# Altium PCB HGD_Sensor(v0.2)-20200901.PcbDoc
Units mil, origin at the board's own origin, x right, y up, seen from the top; angles counter-clockwise.
Board outline 2299.21 x 2125.98 mil, 2 copper layers (TopLayer, BottomLayer); 55 components, 33 nets, 176 pads, 347 vias.
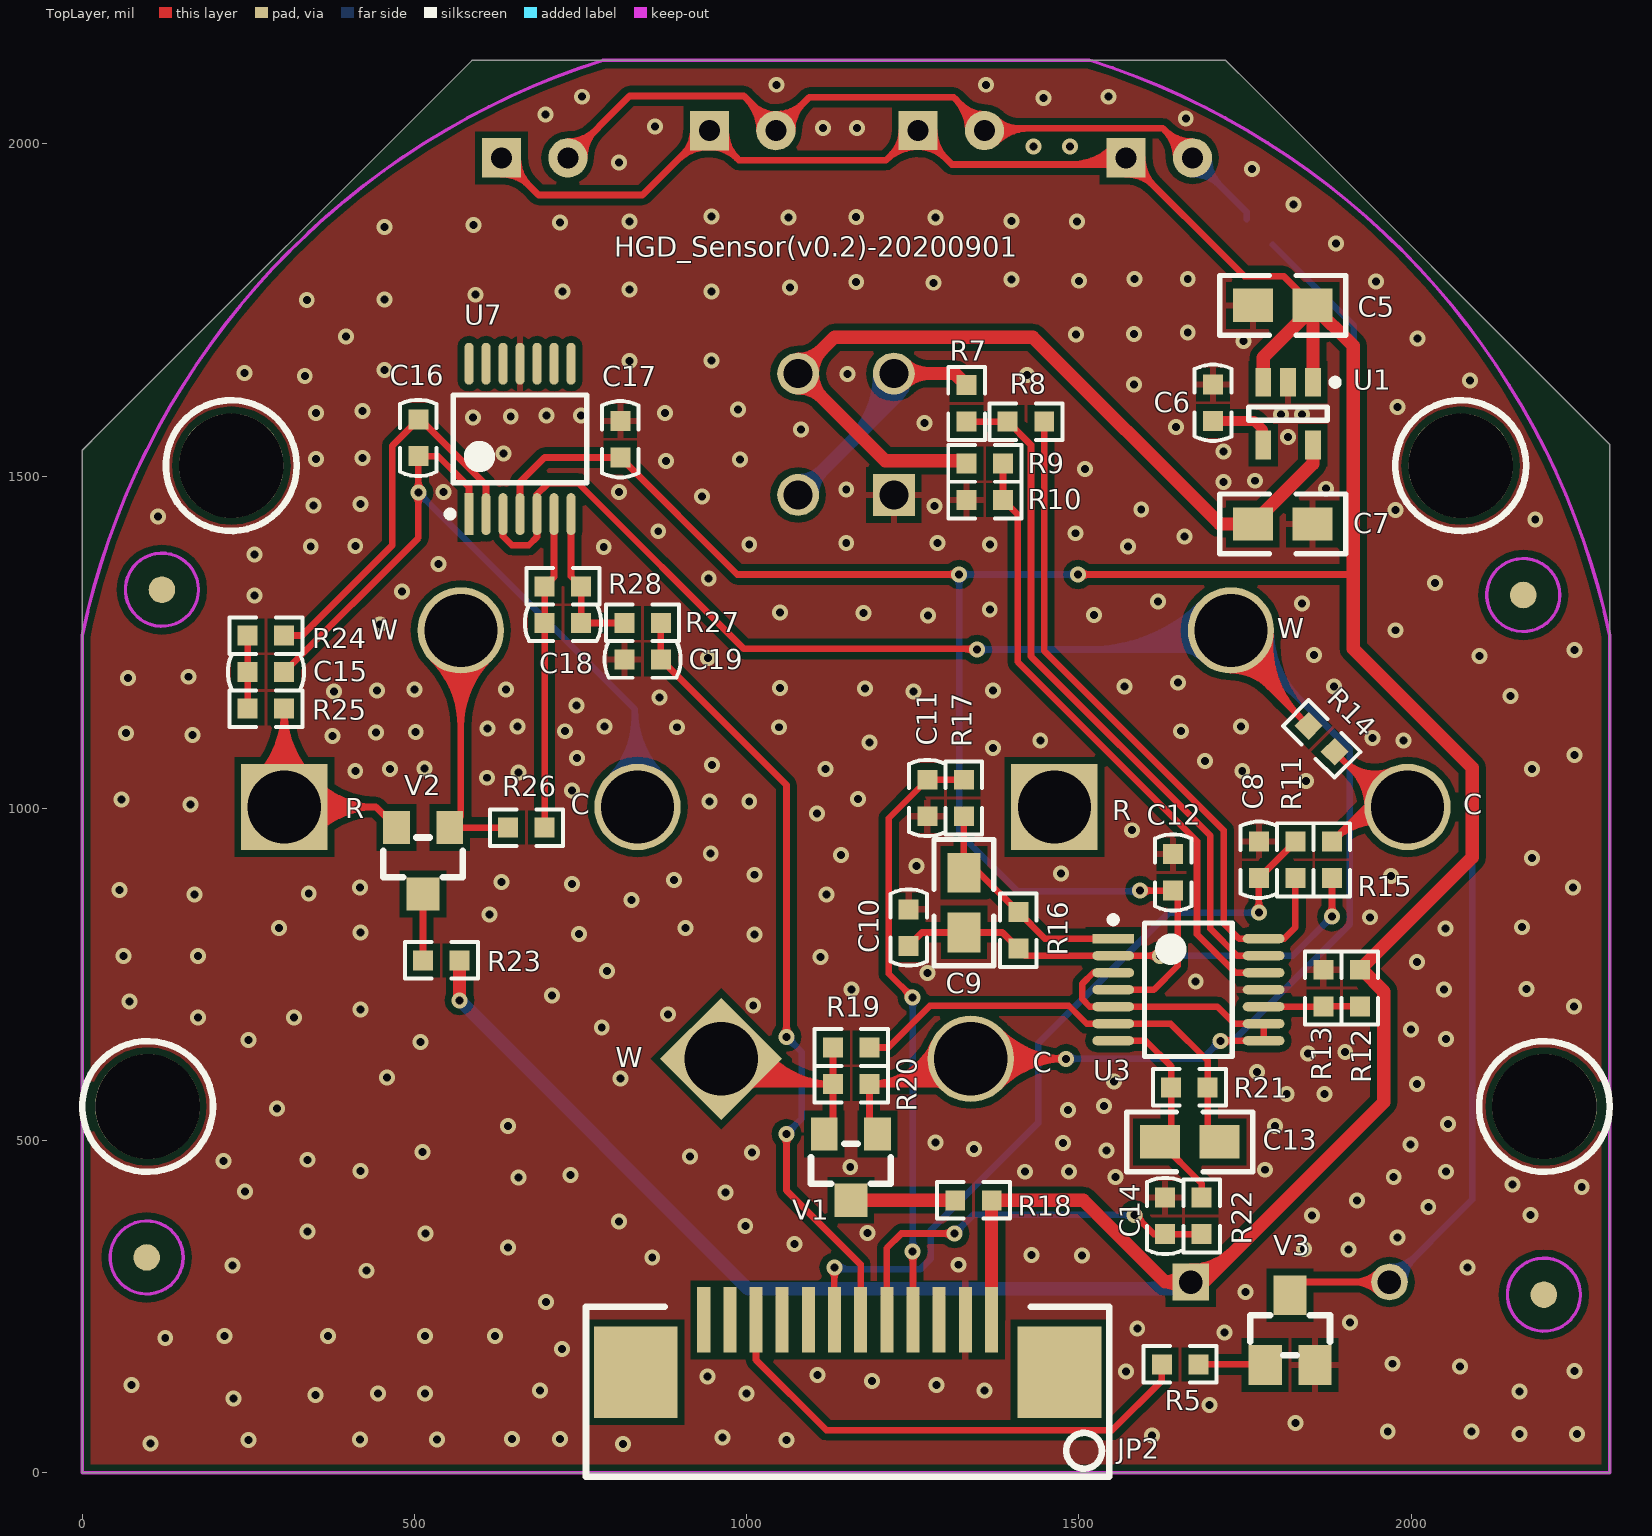
[diagram p0: TopLayer view]
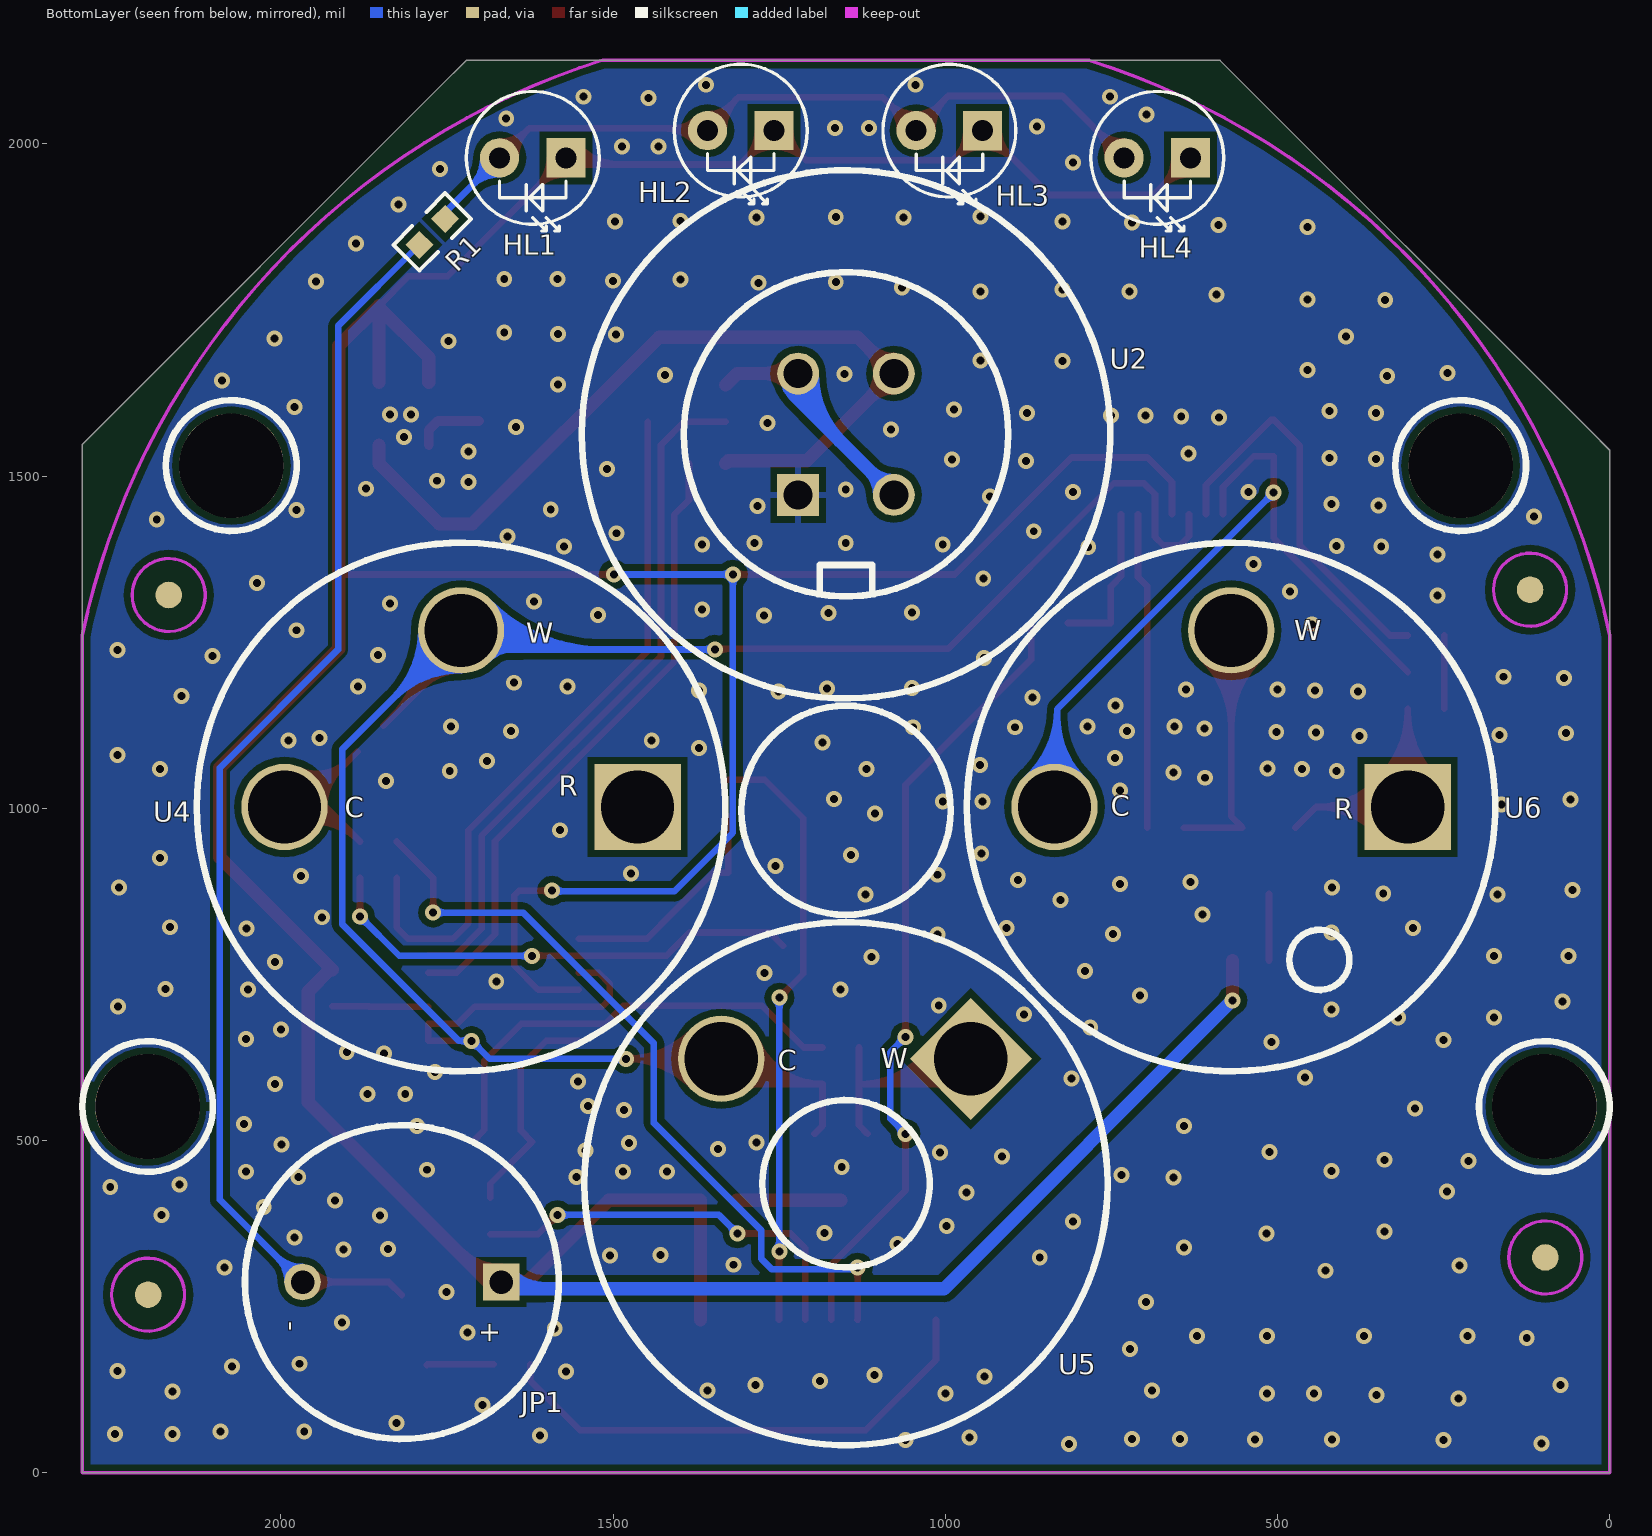
[diagram p1: BottomLayer view, seen from below]

## Layer stack, top to bottom
TopLayer: signal copper 1.4
Dielectric: core 12.6, FR-4, Dk 4.8
BottomLayer: signal copper 1.4

## Board outline
0,0 2299.21,0 2299.21,1547.79 1762,2085 1721.02,2125.98 1515.75,2125.98 783.99,2125.98 783.59,2125.59 586.59,2125.59 30,1569 0,1539 0,1259.84 0,0

## Design rules (kind name [scope] priority, off if disabled: settings)
Clearance Clearance_2 [InNet('RF_IN') vs InNet('GND')] p1: gap=19.68
Clearance [All] p2: gap=10
Clearance Clearance_1 [All] p3: gap=10
ComponentClearance [All] p1 off: gap=10 collisioncheckmode=3 verticalgap=10 showdistances=FALSE
FabricationTestPointUsage TestPointUsage [All] p1: valid=0 allowmultiple=FALSE
FabricationTestpoint Testpoint [(IsPad And (OnTopLayer Or OnBottomLayer))] p1: side=3 testpointundercomponent=TRUE minsize=40 maxsize=100 preferedsize=60 minholesize=20 maxholesize=40 preferedholesize=32 testpointgrid=1 allowsidetop=TRUE allowsidebottom=TRUE usegrid=TRUE gridtolerance=0.01
HoleSize [All] p1: absolutevalues=TRUE maxlimit=200 minlimit=1 maxpercent=80.000 minpercent=20.000
PolygonConnect [IsVia] p1: connectstyle=Direct reliefconductorwidth=10 reliefentries=4 polygonreliefangle="90 Angle"
PolygonConnect PolygonConnect_via [All] p2 off: connectstyle=Relief reliefconductorwidth=10 reliefentries=4 polygonreliefangle="90 Angle"
RoutingVias [All] p1: holewidth=15.75 width=31.5 viastyle="Through Hole" minholewidth=11.81 minwidth=23.62 maxholewidth=19.68 maxwidth=39.37
ShortCircuit [All] p1 off: allowed=FALSE
SilkscreenOverComponentPads [All] p1: minsilkscreentomaskgap=10
SolderMaskExpansion [All] p1: expansion=4
Width [All] p1: maxlimit=100 minlimit=5 preferedwidth=10
22 further rules are at their usual default settings.

## Components (designator, comment, footprint, x,y, rotation, side; value= is the part's Value field where it differs from the comment)
C5 "1uF/25V/5%" 0805 1852,1757 r180 top
C6 "10nF/25V/5%" C0603 1702,1583 r90 top
C7 "1uF/25V/5%" 0805 1762,1428 r0 top
C8 "10nF/25V/5%" C0603 1771,895 r90 top
C9 "1uF/25V/5%" 0805 1327,813 r90 top
C10 "10nF/25V/5%" C0603 1244,793 r90 top
C11 "10nF/25V/5%" C0603 1272,1043 r270 top
C12 "100nF/25V/5%" C0603 1642,931 r270 top
C13 "22uF/25V/5%" 0805 1712,498 r180 top
C14 "10nF/25V/5%" C0603 1630,359 r90 top
C15 "10nF/25V/5%" C0603 304,1205 r180 top
C16 "10nF/25V/5%" C0603 506,1585 r270 top
C17 "100nF/25V/5%" C0603 810,1583 r270 top
C18 "10nF/25V/5%" C0603 751,1279 r180 top
C19 "10nF/25V/5%" C0603 871,1224 r180 top
HL1 "LED红灯" LED-3MM 1571,1979 r0 bottom locked
HL2 "LED红灯" LED-3MM 1258,2020 r0 bottom locked
HL3 "LED红灯" LED-3MM 944,2019.87 r0 bottom locked
HL4 "LED红灯" LED-3MM 631,1979 r0 bottom locked
JP1 "TMB-12A03" TMB-12A03 1818,287 r270 bottom locked
JP2 "FPC-12P" FPC-1.0MM-12P-W 1152,230 r180 top locked
R1 "200R/5%" R0603 1753,1887 r315 bottom
R5 "470R/5%" R0603 1625,163 r0 top
R7 "1K/5%" R0603 1331,1582 r90 top
R8 "4K7/5%" R0603 1448,1582 r180 top
R9 "4K7/5%" R0603 1386,1519 r180 top
R10 "4K7/5%" R0603 1386,1464 r180 top
R11 "10K/5%" R0603 1826,950 r270 top
R12 "4K7/5%" R0603 1923,702 r90 top
R13 "4K7/5%" R0603 1868,702 r90 top
R14 "100R/5%" R0603 1846,1124 r315 top
R15 "470R/5%" R0603 1881,950 r270 top
R16 "10K/5%" R0603 1409,844 r270 top
R17 "10K/5%" R0603 1327,1043 r270 top
R18 "1M/5%" R0603 1314,410 r0 top
R19 "200R/5%" R0603 1185,640 r180 top
R20 "1K/5%" R0603 1130,585 r0 top
R21 "47K/5%" R0603 1694,580 r180 top
R22 "10K/5%" R0603 1685,359 r90 top
R23 "1M/5%" R0603 513,771 r0 top
R24 "10K/5%" R0603 304,1260 r180 top
R25 "10K/5%" R0603 249,1150 r0 top
R26 "100R/5%" R0603 641,971 r0 top
R27 "10K/5%" R0603 816,1279 r0 top
R28 "8K2/5%" R0603 696,1334 r0 top
U1 "SGM2019-3.0YN5G/TR" SGM2019_SOT23-5_95P280X125-5N 1815,1594 r270 top
U2 "MC101" MC101 1149.61,1563 r180 bottom locked
U3 "SGM8634" SGM8634_TSSOP14_65P640X120-14N 1665,727 r0 top
U4 "4O2-GP_V2.0" 4O2-GP_V2.0-1.5K-3.2*2.5*5.8 1729,1002 r180 bottom locked
U5 "ME2-CO" ME2-CO_1.5K-3.2*2.5*5.8 1149.61,435 r225 bottom locked
U6 "4H2S-AS_V2.0" 4H2S-AS_V2.0-1.5K-3.0*2.5*5.8 570,1002 r180 bottom locked
U7 "SGM8634" SGM8634_TSSOP14_65P640X120-14N 659,1556 r90 top locked
V1 "MMBFJ177LT1G" MMBFJ177LT1G_SOT-23 1157,455 r180 top
V2 "MMBFJ177LT1G" MMBFJ177LT1G_SOT-23 513,916 r180 top
V3 "S8050" SOT-23 1818,267 r0 top locked

## Footprints (in the part's own frame and the unit in brackets; to place one, negate y for a bottom-side part, rotate by r counter-clockwise, add the part's x,y. Pads: shape width x height; smd on the part's side, far side on the other; paste and mask are expansions set on the pad)
4H2S-AS_V2.0-1.5K-3.0*2.5*5.8 [mm] "4H2S-AS_V2.0：H2S传感器，4系列插针"
  rect 3.3x3.3 hole 2.8: 1(6.75,0)
  round 3.3 hole 2.8: 2(0,6.75) 3(-6.75,0)
  silkscreen extent -10.1,-10.1 10.1,10.1
4O2-GP_V2.0-1.5K-3.2*2.5*5.8 [mm] "4O2-GP_V2.0：O2传感器，4系列插针"
  rect 3.3x3.3 hole 2.8: 1(6.75,0)
  round 3.3 hole 2.8: 2(0,6.75) 3(-6.75,0)
  silkscreen extent -10.1,-10.1 10.1,10.1
0805 [mil]
  rect 60x50 smd: 1(0,0) 2(90,0)
  silkscreen extent -50,-45 140,45
C0603 [mil]
  rect 30x30 smd: 1(0,0) 2(55,0)
  silkscreen extent -30,-28 85,28
FPC-1.0MM-12P-W [mm] "FPC-1.0MM-12P-W：卧式，抽拉式上接，12P"
  rect 3.2x3.5 smd: 0(-8.1,2) 0(8.1,2)
  rect 0.5x2.5 smd: 1(-5.5,0) 2(-4.5,0) 3(-3.5,0) 4(-2.5,0) 5(-1.5,0) 6(-0.5,0) 7(0.5,0) 8(1.5,0) 9(2.5,0) 10(3.5,0) 11(4.5,0) 12(5.5,0)
  silkscreen extent -10,-0.5 10,6
LED-3MM [mm]
  rect 1.5x1.5 hole 0.8: A(0,0)
  round 1.5 hole 0.8: K(2.54,0)
  silkscreen extent -1.27,-2.54 3.81,2.79
MC101 [mm] "MC101：可燃气体传感器"
  rect 1.6x1.6 hole 1.1: 1(-1.83,-2.32)
  round 1.6 hole 1.1: 2(1.83,-2.32) 3(1.83,2.32) 4(-1.83,2.32)
  silkscreen extent -10.1,-10.1 10.1,10.1
ME2-CO_1.5K-3.2*2.5*5.8 [mm] "ME2-CO：CO传感器，4系列插针"
  rect 3.3x3.3 hole 2.8: 1(0,6.75)
  round 3.3 hole 2.8: 2(-6.75,0)
  silkscreen extent -10,-10 10,10
MMBFJ177LT1G_SOT-23 [mil]
  rect 40x50 smd: 1(-40,-55) 2(40,-55)
  rect 50x50 smd: 3(0,45)
  silkscreen extent -60,-40 60,20
R0603 [mil] "R0603封装电阻"
  rect 30x30 smd: 1(0,0) 2(55,0)
  silkscreen extent -28,-27 82,28
SGM2019_SOT23-5_95P280X125-5N [mm] "SOT23, 5-Leads, Body 3.0x3.0mm (max), Pitch 0.95mm, IPC Medium Density"
  rect 1.1x0.6 smd: 1(-1.2,0.95) 2(-1.2,0) 3(-1.2,-0.95) 4(1.2,-0.95) 5(1.2,0.95)
  silkscreen extent -1.32,-1.5 0.25,1.93, body extent -0.85,-1.51 0.85,1.51, height 1.25
SGM8634_TSSOP14_65P640X120-14N [mm] "TSOP, 14-Leads, Body 5.1x4.5mm (max), Pitch 0.65mm, IPC Medium Density"
  rect 1.6x0.35 smd: 1(-2.875,1.95)
  oval 1.6x0.35 smd: 2(-2.875,1.3) 3(-2.875,0.65) 4(-2.875,0) 5(-2.875,-0.65) 6(-2.875,-1.3) 7(-2.875,-1.95) 8(2.875,-1.95) 9(2.875,-1.3) 10(2.875,-0.65) 11(2.875,0) 12(2.875,0.65) 13(2.875,1.3) 14(2.875,1.95)
  silkscreen extent -3,-2.55 1.68,2.8, body extent -2.25,-2.55 2.25,2.55, height 1.2
SOT-23 [mil]
  rect 50x60 smd: B(-37.5,-105) C(0,0) E(37.5,-105)
  silkscreen extent -60,-90 60,-30
TMB-12A03 [mm] "TMB-12A03：3.3V有源蜂鸣器"
  rect 1.4x1.4 hole 0.9: 1(0,3.8)
  round 1.4 hole 0.9: 2(0,-3.8)
  silkscreen extent -6,-6 6,6

## Part data
C5 C6 C7 C8 C9 C10 C11 C12 C13 C14 C15 C16 C17 C18 C19: library part CAP, "电容"
HL1 HL2 HL3 HL4: library part 发光二极管, "发光二极管"
JP1: "TMB-12A03：3.3V有源蜂鸣器"
R1 R5 R7 R8 R9 R10 R11 R12 R13 R14 R15 R16 R17 R18 R19 R20 R21 R22 R23 R24 R25 R26 R27 R28: library part RES2, "电阻"
U1: library part SGM2019, "SGM2019：Low Power, Low Dropout, RF Linear Regulators"
U2: "MC101：可燃气体传感器"
U3 U7: "SGM8634：470μA, 6MHz, Rail-to-Rail I/O, CMOS Operational Amplifier"
U4: "4O2-GP_V2.0：O2传感器"
U5: "ME2-CO：CO传感器"
U6: "4H2S-AS_V2.0：H2S传感器"
V1 V2: "MMBFJ177LT1G：P-JFET?Chopper"
V3: library part NPN, "NPN三极管"

## Free pads (board coordinates)
  round 40 smd far side: 0(97,324) 0(120,1329) 0(2169,1321) 0(2200,268)
  round 157.48 hole 157.48: 0(98.43,551.18) 0(224.41,1515.75) 0(2074.8,1515.75) 0(2200.79,551.18)
  round 40 smd: 1(97,324) 1(120,1329) 1(2169,1321) 1(2200,268)
  round 100 on Bottom Solder: 2(97,324) 2(120,1329) 2(2169,1321) 2(2200,268)
  round 100 on Top Solder: 3(97,324) 3(120,1329) 3(2169,1321) 3(2200,268)

## Via types
v1: diameter 24, hole 12, TopLayer to BottomLayer, tented both sides, 347 vias

## Nets (pads, with @x,y where several pads share a name; then routed paths per layer and width w, separated by ;. In a path a pad name is that pad's centre, name@x,y a point inside that pad or via, vN(x,y) a via of type N, cw(c..) or ccw(c..) an arc to the next point about the centre after c; other vN are vias at no path point)
3V: C7.1 R9.2 U1.5 U2.3 | length 1615.2
  TopLayer w20: R9.2 1326.84,1523.16 1208.74,1523.16 U2.3 1132.22,1709 1431,1709 1712,1428 C7.1 1852.4,1518.4 U1.5 ; U2.3@1099.06,1654.34 ccw(c1150.95,1654.34) 1114.26,1617.64 ; U2.3@1099.06,1654.34 cw(c1150.95,1654.34) 1114.26,1691.03 ; U2.3@1099.06,1654.34 ccw(c1150.95,1654.34) 1114.26,1617.64 ; U2.3@1099.06,1654.34 cw(c1150.95,1654.34) 1114.26,1691.03 ; 1114.26,1617.64 ccw(c1077.56,1580.95) 1077.56,1632.84 cw(c1077.56,1580.95) 1114.26,1617.64 ; 1114.26,1691.03 cw(c1077.56,1727.73) 1077.56,1675.83 ccw(c1077.56,1727.73) 1114.26,1691.03
3V3: C5.1 C12.2 C17.2 HL1.A HL2.A HL3.A HL4.A JP1.1 JP2.1 R12.2 R18.2 R23.2 U1.1 U1.3 U3.4 U7.4 | length 9391.6
  TopLayer w10: HL4.A@631,1954.47 cw(c631,1895.26) 672.87,1937.13 cw(c714.74,1979) HL4.A@655.53,1979 ; HL4.A@631,1964.47 cw(c631,1929.4) 655.8,1954.2 cw(c680.6,1979) HL4.A@645.53,1979 ; HL4.A 687,1923 843.13,1923 944,2023.87 HL3.A@946,2021.87 ; U7.4 659,1491 696,1528 C17.2 986,1352 v1(1320,1352) ; 895.3,1975.17 cw(c944,1926.47) 944,1995.35 cw(c944,1936.13) 985.87,1978 cw(c1027.74,2019.87) HL3.A@968.53,2019.87 ; 904.96,1984.83 ccw(c869.91,2019.87) HL3.A@919.47,2019.87 ; 912.37,1992.25 cw(c944,1960.62) 944,2005.35 cw(c944,1970.27) 968.8,1995.07 cw(c993.6,2019.87) HL3.A@958.53,2019.87 ; HL3.A 988.53,1975.35 1209.47,1975.35 1258,2023.87 HL2.A@1259.94,2021.94 ; 1209.52,1975.39 cw(c1258,1926.91) 1258,1995.47 cw(c1258,1936.26) 1299.87,1978.13 cw(c1341.74,2020) HL2.A@1282.53,2020 ; 1218.87,1984.74 ccw(c1183.61,2020) HL2.A@1233.47,2020 ; 1226.59,1992.46 cw(c1258,1961.05) 1258,2005.47 cw(c1258,1970.4) 1282.8,1995.2 cw(c1307.6,2020) HL2.A@1272.53,2020 ; HL2.A 1309,1969 1561,1969 HL1.A 1749,1801 1808,1801 C5.1 C5.1@1852.4,1756.6 ; v1@1315.05,1347.05 ccw(c1303.1,1335.1) 1303.1,1352 ccw(c1303.1,1368.9) v1@1315.05,1356.95 ; 1487.64,1969 ccw(c1487.64,2062.36) HL1.A@1553.66,1996.34 ; v1(1499,1352) 1913,1352 ; v1@1503.95,1347.05 cw(c1515.9,1335.1) 1515.9,1352 cw(c1515.9,1368.9) v1@1503.95,1356.95 ; 1511.79,1969 ccw(c1511.79,2038.21) HL1.A@1560.73,1989.27 ; U3.4 1613,727 1649,763 1649,869 C12.2 v1(1592,876) ; HL1.A@1553.66,1961.66 ccw(c1535.93,1943.93) 1535.93,1969 ccw(c1535.93,2014.07) HL1.A@1567.8,1982.2 ; HL1.A@1571,1954.47 cw(c1571,1895.26) 1612.87,1937.13 cw(c1654.74,1979) HL1.A@1595.53,1979 ; HL1.A@1571,1964.47 cw(c1571,1929.4) 1595.8,1954.2 cw(c1620.6,1979) HL1.A@1585.53,1979 ; v1@1596.95,871.05 cw(c1608.9,859.1) 1608.9,876 cw(c1608.9,892.9) v1@1596.95,880.95
  TopLayer w20: v1(568,711) R23.2 ; JP2.1 1368.54,409.54 R18.2 1507,410 1630,287 ; U1.3 1777.6,1678.6 C5.1@1852,1753 ; U1.1 1852.4,1756.6 1913,1696 1913,1352 1913,1240 2092,1061 2092,926 R12.2 ; R12.2@1926.28,757 1959,724.28 1959,557.61 1688.39,287 JP1.1 1630,287 ; 1630,287 cw(c1630,253.81) 1655.11,275.52 ccw(c1630,253.81) 1630,287 ; 1630,287 ccw(c1630,320.19) 1655.11,298.48 cw(c1630,320.19) 1630,287 ; JP1.1@1668.39,284.56 ccw(c1668.39,326.95) 1698.37,296.98 cw(c1668.39,326.95) JP1.1@1668.39,284.56 ; JP1.1@1668.39,304.56 ccw(c1668.39,395.23) 1732.51,331.12 cw(c1668.39,395.23) JP1.1@1668.39,304.56
  BottomLayer w10: v1@1315.05,1347.05 cw(c1303.1,1335.1) 1320,1335.1 cw(c1336.9,1335.1) 1324.95,1347.05 cw(c1336.9,1335.1) 1336.9,1352 cw(c1336.9,1368.9) v1@1324.95,1356.95 ; v1@1494.05,1347.05 ccw(c1482.1,1335.1) 1482.1,1352 ccw(c1482.1,1368.9) v1@1494.05,1356.95 ; v1(1499,1352) v1(1320,1352) 1320,963 1408,875 1591,875 v1(1592,876) ; 1572.69,875 ccw(c1572.69,895.31) v1@1587.05,880.95 ; 1577.51,875 cw(c1577.51,861.51) v1@1587.05,871.05
  BottomLayer w20: v1(568,711) 1002,277 1658.39,277 JP1.1 ; 1601.86,277 ccw(c1601.86,353.53) 1655.98,299.42 cw(c1601.86,353.53) 1601.86,277
ADC_CO: C14.1 JP2.5 R22.1 | length 720.9
  TopLayer w10: JP2.5 1211.06,338.06 1233,360 v1(1313,360) ; v1@1308.05,355.05 ccw(c1296.1,343.1) 1296.1,360 ccw(c1296.1,376.9) v1@1308.05,364.95 ; v1@1584,381 cw(c1584,364.1) 1595.95,376.05 cw(c1607.9,388) v1@1591,388 ; v1(1584,388) 1613,359 C14.1 R22.1
  BottomLayer w10: v1(1313,360) 1341,388 v1(1584,388) ; v1@1313,367 ccw(c1313,383.9) 1324.95,371.95 ccw(c1336.9,360) v1@1320,360 ; v1@1579.05,383.05 ccw(c1567.1,371.1) 1567.1,388 ccw(c1567.1,404.9) v1@1579.05,392.95
ADC_H2S: C19.1 JP2.6 R27.2 | length 1361.1
  TopLayer w10: R27.2 C19.1 1060,1035 v1(1060,656) ; v1@1055.05,505.05 cw(c1043.1,493.1) 1060,493.1 cw(c1076.9,493.1) v1@1064.95,505.05 ; v1@1055.05,660.95 ccw(c1043.1,672.9) 1060,672.9 ccw(c1076.9,672.9) v1@1064.95,660.95 ; v1(1060,510) 1060,425 1171.68,313.32 JP2.6 1171.68,292.32
  BottomLayer w10: v1(1060,510) 1083,533 1083,633 v1(1060,656) ; v1@1060,517 ccw(c1060,533.9) 1071.95,521.95 ccw(c1083.9,510) v1@1067,510 ; v1@1060,649 cw(c1060,632.1) 1071.95,644.05 cw(c1083.9,656) v1@1067,656
ADC_LEL: C8.1 JP2.7 R11.1 | length 1315.5
  TopLayer w10: v1(1132,309) 1132,230.32 JP2.7 ; v1@1766.05,847.95 ccw(c1754.1,859.9) 1771,859.9 ccw(c1787.9,859.9) v1@1775.95,847.95 ; v1(1771,843) C8.1 R11.1 ; 1132,292.1 cw(c1148.9,292.1) 1136.95,304.05 ccw(c1148.9,292.1) 1132,292.1 ; 1132,292.1 ccw(c1115.1,292.1) 1127.05,304.05 cw(c1115.1,292.1) 1132,292.1
  BottomLayer w10: v1(1132,309) 1135,306 1261.18,306 1277,321.82 1277,364.47 1438.73,526.2 1438.73,645.92 1635.81,843 v1(1771,843) ; v1@1766.05,838.05 ccw(c1754.1,826.1) 1754.1,843 ccw(c1754.1,859.9) v1@1766.05,847.95 ; v1@1136.95,313.95 ccw(c1156.14,333.14) 1156.14,306 cw(c1156.14,333.14) v1@1136.95,313.95
ADC_O2: C11.1 JP2.4 R17.1 | length 1013.3
  TopLayer w10: v1@1243,715 ccw(c1226.1,715) 1238.05,726.95 ccw(c1250,738.9) v1@1250,722 ; v1@1245.05,328.05 cw(c1232.07,315.07) 1250.43,315.07 ; v1(1250,333) 1250.43,332.57 JP2.4 ; v1(1250,715) 1214,751 1214,985 C11.1 R17.1 ; 1250.43,317.13 cw(c1265.87,317.13) v1@1254.95,328.05
  BottomLayer w10: v1@1245.05,337.95 ccw(c1233.1,349.9) 1250,349.9 ccw(c1266.9,349.9) v1@1254.95,337.95 ; v1@1245.05,710.05 cw(c1233.1,698.1) 1250,698.1 cw(c1266.9,698.1) v1@1254.95,710.05 ; v1(1250,333) v1(1250,715)
AGND: R14.1 R20.2 U3.3 U3.5 U3.8 U3.9 U4.2 U5.2 U7.3 U7.5 V1.1 | length 7241.2
  TopLayer w10: U7.3 633.41,1409.59 647,1396 672,1396 684.59,1408.59 U7.5 684.59,1472.78 699.4,1487.59 ; 701.11,1489.31 746.69,1489.31 996,1240 v1@1346,1240 ; V1.1 1185,522 R20.2 ; 1200.59,585 ccw(c1200.59,685.66) U5.2@1292.1,643.73 ; 1216.17,585 ccw(c1216.17,678.52) U5.2@1301.19,639.56 ; 1231.75,585 ccw(c1231.75,671.38) U5.2@1310.28,635.39 ; 1247.34,585 ccw(c1247.34,664.24) U5.2@1319.37,631.23 ; 1262.92,585 ccw(c1262.92,657.1) U5.2@1328.46,627.06 ; 1278.5,585 ccw(c1278.5,649.96) U5.2@1337.55,622.9 ; U5.2@1283.01,647.89 cw(c1185,692.81) R20.2 ; 1284.29,585 cw(c1284.29,569.68) U5.2@1295.12,580.51 ; 1327.69,1240 cw(c1327.69,1219.69) v1@1342.05,1234.05 ; 1332.51,1240 ccw(c1332.51,1253.49) v1@1342.05,1243.95 ; U5.2@1358.85,601.87 cw(c1409.16,552.23) 1409.16,622.91 cw(c1409.16,693.6) U5.2@1358.85,643.95 ; U5.2@1365.97,594.85 cw(c1433.08,528.64) 1433.08,622.91 cw(c1433.08,717.19) U5.2@1365.97,650.98 ; U5.2@1373.08,587.82 cw(c1456.99,505.04) 1456.99,622.91 cw(c1456.99,740.78) U5.2@1373.08,658 ; U5.2@1380.2,580.8 cw(c1480.9,481.45) v1@1480.9,622.91 ; U5.2@1380.2,665.02 ccw(c1480.9,764.37) v1@1480.9,622.91 ; 1463.89,622.91 ccw(c1463.89,640.11) v1@1476.05,627.95 ; 1464.31,622.91 cw(c1464.31,606.31) v1@1476.05,618.05 ; v1(1481,623) v1@1480.91,622.91 ; U3.3 1521.84,752.59 1505.32,736.07 1505.32,712.68 1516.59,701.41 U3.5 1708.59,701.41 1734.18,675.82 U3.9 U3.8 v1@1713.23,650.23 ; v1@1717.95,645.05 cw(c1730.45,632.55) 1730.45,650.23 ; v1@1717.95,654.95 ccw(c1729.35,666.35) 1729.35,650.23 ; U4.2@1729,1207.79 cw(c1729,1127.61) 1785.7,1184.3 ; U4.2@1729,1217.79 cw(c1729,1161.75) 1768.63,1201.37 ; U4.2 1729,1241 R14.1 ; U4.2@1748.85,1265.67 ccw(c1833.4,1256.82) 1773.29,1196.71 ; U4.2@1758.8,1264.63 ccw(c1860.25,1254.01) 1788.12,1181.88 ; U4.2@1768.74,1263.59 ccw(c1887.11,1251.2) 1802.96,1167.04 ; U4.2@1778.69,1262.55 ccw(c1913.97,1248.39) 1817.79,1152.21 ; U4.2@1788.63,1261.51 ccw(c1940.82,1245.58) 1832.62,1137.38 ; R20.2 1299.61,585 U5.2 v1@1480.91,622.91
  BottomLayer w10: v1(1347,1239) 1700.25,1239 U4.2 1908,1088.75 1908,825.82 1732.18,650 v1(1713,650) 1686,623 v1(1481,623) ; v1@1351.95,1234.05 cw(c1363.9,1222.1) 1363.9,1239 cw(c1363.9,1255.9) v1@1351.95,1243.95 ; v1@1485.95,618.05 cw(c1497.9,606.1) 1497.9,623 cw(c1497.9,639.9) v1@1485.95,627.95 ; 1514.84,1239 ccw(c1514.84,1481.91) U4.2@1686.6,1310.15 ; 1538.98,1239 ccw(c1538.98,1457.77) U4.2@1693.67,1303.08 ; 1563.12,1239 ccw(c1563.12,1433.63) U4.2@1700.74,1296 ; 1587.26,1239 ccw(c1587.26,1409.48) U4.2@1707.81,1288.93 ; 1611.41,1239 ccw(c1611.41,1385.34) U4.2@1714.89,1281.86 ; 1635.55,1239 ccw(c1635.55,1361.2) U4.2@1721.96,1274.79 ; 1653.65,1239 cw(c1653.65,1192.39) U4.2@1686.6,1225.35 ; 1659.69,1239 ccw(c1659.69,1337.06) U4.2 ; v1@1706,650 cw(c1689.1,650) 1701.05,638.05 cw(c1713,626.1) v1@1713,643 ; v1@1717.95,645.05 cw(c1729.9,633.1) 1729.9,650 cw(c1729.9,666.9) v1@1717.95,654.95 ; U4.2@1729,1207.79 cw(c1729,1063.03) 1831.36,1165.39 cw(c1933.72,1267.75) U4.2@1788.96,1267.75 ; U4.2@1729,1217.79 cw(c1729,1097.17) 1814.29,1182.46 cw(c1899.58,1267.75) U4.2@1778.96,1267.75 ; U4.2@1729,1227.79 cw(c1729,1131.31) 1797.22,1199.53 cw(c1865.43,1267.75) U4.2@1768.96,1267.75 ; U4.2@1729,1237.79 cw(c1729,1165.46) 1780.15,1216.6 cw(c1831.29,1267.75) U4.2@1758.96,1267.75
BEEP: JP2.10 R5.1 | length 769.9
  TopLayer w10: JP2.10 1014.2,169.8 1120,64 1550,64 1625,139 R5.1
DGND: C5.2 C6.2 C7.2 C8.2 C10.2 C11.2 C12.1 C14.2 C17.1 C19.2 JP2.2 R10.2 R13.2 U1.2 U2.1 U3.11 U7.11 V3.E
  other v1: 814,43 103,44 250,49 1060,49 418,50 534,50 647,51 719,51 964,53 1610,56 2163,58 2250,58 1965,62 2091,62 1826,75 1697,102 228,112 351,117 445,119 516,119 1000,119 2163,122 689,124 1358,124 74,132 1286,132 1189,138 941,145 1107,147 1571,152 2246,153 2074,160 1972,164 722,186 125,203 214,206 370,206 516,206 621,206 1719,211 1588,217 1908,226 698,257 1751,272 428,304 2085,309 226,312 1319,313 858,324 1505,327 1429,328 1906,336 1839,337 641,339 1072,344 1980,354 517,360 1182,361 339,363 998,371 808,378 1851,387 2180,388 2026,400 1919,410 968,422 245,423 2257,430 2153,434 657,444 1555,445 1974,445 735,448 1419,453 1485,453 2053,453 419,454 1780,456 1156,460 213,469 339,471 915,476 1008,482 512,483 1542,485 1342,487 1999,494 1476,496 1284,497 641,522 1795,522 2056,525 1484,546 293,548 1538,552 1813,570 1870,570 2009,585 1553,589 810,593 459,595 1768,603 1845,631 1901,633 509,648 250,651 2053,653 2000,667 782,670 174,685 319,685 882,690 419,697 2245,702 1010,703 71,709 707,718 1158,727 2050,727 2174,728 1676,739 1272,752 790,755 2009,769 1111,776 62,778 174,778 1012,810 748,811 419,813 2052,819 296,820 908,820 2167,821 1938,836 613,840 827,862 169,870 1120,870 341,872 56,877 418,881 2244,881 737,886 631,889 891,892 1970,898 1012,900 1473,902 1256,913 2182,925 1142,930 946,932 1580,967 1106,992 163,1006 944,1010 1004,1010 59,1013 1168,1014 737,1027 1842,1041 609,1046 657,1054 411,1056 1746,1056 463,1059 1119,1059 2182,1059 515,1060 948,1065 1690,1071 745,1076 2246,1080 1371,1091 1185,1099 1442,1102 1989,1102 1942,1106 377,1109 166,1110 66,1113 442,1114 502,1115 727,1116 1654,1116 610,1120 895,1122 1049,1122 655,1123 786,1123 1744,1123 744,1155 869,1167 2150,1169 379,1176 1251,1176 444,1177 1371,1177 500,1179 638,1179 1178,1180 1050,1181 1569,1183 1884,1183 1649,1189 69,1196 160,1198 942,1226 2103,1229 1854,1231 2246,1238 1977,1268 448,1277 1273,1290 1523,1291 1176,1294 1050,1295 1366,1299 1836,1308 1619,1311 259,1320 481,1326 2036,1339 943,1346 536,1368 259,1382 785,1393 344,1394 1574,1394 411,1395 1004,1397 1366,1397 1150,1399 1287,1399 1659,1409 1495,1414 867,1417 2187,1435 114,1439 1977,1449 1594,1450 1283,1455 348,1456 419,1458 933,1469 544,1476 808,1476 1150,1480 1872,1481 1718,1491 1765,1493 1509,1511 879,1523 990,1525 352,1526 422,1527 634,1534 1718,1537 1815,1559 1082,1570 1646,1574 1268,1580 588,1588 645,1590 699,1591 751,1591 1804,1593 1836,1593 352,1595 877,1595 422,1598 987,1600 1980,1604 1583,1638 2089,1644 335,1651 1422,1652 1152,1654 244,1655 455,1660 824,1673 947,1674 1748,1703 2010,1707 397,1710 1496,1713 1583,1714 1664,1716 338,1765 455,1766 592,1773 723,1778 947,1778 824,1781 1065,1784 1281,1791 1165,1792 1947,1793 1500,1794 1399,1796 1584,1797 1664,1797 1887,1850 455,1875 589,1878 719,1882 824,1883 1497,1883 1399,1884 1063,1889 1284,1889 1165,1890 947,1891 1823,1909 1761,1962 808,1972 1432,1996 1487,1996 1115,2024 1166,2024 862,2026 1661,2038 697,2044 1447,2069 752,2071 1545,2071 1045,2089 1360,2089
H2S_C: C15.1 C16.2 U6.3 U7.1 | length 1917.5
  TopLayer w10: C15.1 506,1407 v1(506,1475) ; v1@501.05,1479.95 ccw(c489.1,1491.9) 506,1491.9 ccw(c522.9,1491.9) v1@510.95,1479.95 ; 506,1457.82 v1(506,1475) ; U7.1 582.23,1483.77 536,1530 C16.2 v1(506,1475) ; 506,1458.1 cw(c522.9,1458.1) 510.95,1470.05 ccw(c522.9,1458.1) 506,1458.1 ; 506,1458.1 ccw(c489.1,1458.1) 501.05,1470.05 cw(c489.1,1458.1) 506,1458.1
  BottomLayer w10: v1@506,1468 cw(c506,1451.1) 517.95,1463.05 cw(c529.9,1475) v1@513,1475 ; v1(506,1475) 831.75,1149.25 ; U6.3@793.35,1044.4 ccw(c700.65,1137.1) 831.75,1137.1 ; U6.3@800.42,1037.33 ccw(c724.79,1112.96) 831.75,1112.96 ; U6.3@807.49,1030.26 ccw(c748.93,1088.82) 831.75,1088.82 ; U6.3@831.75,971 831.75,1149.25 ; 831.75,1080.18 ccw(c908.76,1080.18) U6.3@856.2,1023.9 ; 831.75,1103.2 ccw(c930.26,1103.2) U6.3@863.02,1031.21 ; 831.75,1126.22 ccw(c951.75,1126.22) U6.3@869.85,1038.51 ; U6.3@876.67,1045.82 cw(c973.25,1149.24) 831.75,1149.24
H2S_R: R25.2 U6.1 V2.2 | length 1643.3
  TopLayer w10: U6.1@261.85,1044.4 ccw(c160.1,1146.15) R25.2@304,1146.15 ; U6.1@268.92,1037.33 ccw(c184.24,1122.01) 304,1122.01 ; U6.1@276,1030.26 ccw(c208.39,1097.86) 304,1097.86 ; U6.1@283.07,1023.19 ccw(c232.53,1073.72) 304,1073.72 ; 304,1074.94 ccw(c377.19,1074.94) U6.1@325.44,1023.19 ; 304,1099.08 ccw(c401.33,1099.08) U6.1@332.51,1030.26 ; 304,1123.22 ccw(c425.48,1123.22) U6.1@339.58,1037.33 ; R25.2@304,1147.37 ccw(c449.62,1147.37) U6.1@346.65,1044.4 ; R25.2 304,1002.25 U6.1 442,1002 ; U6.1@326.18,981.59 cw(c373.08,937.93) 373.08,1002 cw(c373.08,1066.07) U6.1@326.18,1022.41 ; U6.1@333.5,974.77 cw(c396.05,916.54) 396.05,1002 cw(c396.05,1087.46) U6.1@333.5,1029.23 ; U6.1@340.82,967.96 cw(c419.02,895.15) 419.02,1002 cw(c419.02,1108.85) U6.1@340.82,1036.04 ; U6.1@348.14,961.14 cw(c441.99,873.77) 441.99,1002 ; U6.1@348.14,1042.86 ccw(c441.99,1130.23) 441.99,1002 ; V2.2 442,1002
H2S_W: R26.1 U6.2 V2.1 | length 1073.8
  TopLayer w10: U6.2@527.6,1225.35 cw(c425.24,1122.99) 570,1122.99 cw(c714.76,1122.99) U6.2@612.4,1225.35 ; U6.2@534.67,1232.42 cw(c449.38,1147.13) 570,1147.13 cw(c690.62,1147.13) U6.2@605.33,1232.42 ; U6.2@541.74,1239.49 cw(c473.53,1171.27) 570,1171.27 cw(c666.47,1171.27) U6.2@598.26,1239.49 ; U6.2@548.81,1246.56 cw(c497.67,1195.42) 570,1195.42 cw(c642.33,1195.42) U6.2@591.19,1246.56 ; U6.2 570,988 V2.1 R26.1
LED: JP1.2 R1.2 V3.C | length 2160.9
  TopLayer w10: V3.C 1838,287 JP1.2 ; JP1.2@1951.65,271.05 ccw(c1913.14,232.54) 1913.14,287 ccw(c1913.14,341.46) JP1.2@1951.65,302.95 ; JP1.2@1958.73,278.12 ccw(c1937.29,256.68) 1937.29,287 ccw(c1937.29,317.32) JP1.2@1958.73,295.88
  BottomLayer w10: R1.2 1914,1726 1914,1239 2092,1061 2092,410.82 JP1.2@1968.18,287 ; JP1.2@1967.61,299.56 ccw(c1967.61,331.27) 1990.03,308.85 ; JP1.2@1967.61,309.56 ccw(c1967.61,365.42) 2007.1,325.92 ; JP1.2@1980.17,287 cw(c2009.09,287) 1988.64,307.45 ; JP1.2@1990.17,287 cw(c2043.23,287) 2005.71,324.52
NetC6_1: C6.1 U1.4 | length 103.9
  TopLayer w15: C6.1 1764,1583 1777.6,1569.4 U1.4
NetC9_1: C9.1 C10.1 R15.2 R16.2 U3.2 | length 883.4
  TopLayer w10: C10.1 1264,813 C9.1 1385,813 R16.2 1419.82,778.18 U3.2 ; 1586.82,778.18 U3.2 ; 1604.66,778.18 cw(c1604.66,760.66) v1@1617.05,773.05 ; 1605.54,778.18 ccw(c1605.54,794.46) v1@1617.05,782.95 ; v1(1622,778) 1621.82,778.18 U3.2 ; v1@1876.05,841.95 ccw(c1864.1,853.9) 1881,853.9 ccw(c1897.9,853.9) v1@1885.95,841.95 ; v1(1881,837) R15.2
  BottomLayer w10: v1(1622,778) 1822,778 v1(1881,837) ; v1@1626.95,773.05 cw(c1638.9,761.1) 1638.9,778 cw(c1638.9,794.9) v1@1626.95,782.95 ; v1@1874,837 cw(c1857.1,837) 1869.05,825.05 cw(c1881,813.1) v1@1881,830
NetC9_2: C9.2 R16.1 R17.2 U3.1 | length 350.9
  TopLayer w10: R17.2 C9.2 1350,903 R16.1 1449.23,803.77 U3.1
NetC13_1: C13.1 R19.1 R21.1 U3.6 | length 698.8
  TopLayer w10: R19.1 1213.18,640 1276.06,702.87 1484.95,702.87 1512,675.82 U3.6 1638.18,675.82 1694,620 R21.1 1694,516 C13.1
NetC13_2: C13.2 R21.2 R22.2 U3.7 | length 334.2
  TopLayer w10: U3.7 1600.77,650.23 1639,612 R21.2 1639,515 C13.2 1685,435 R22.2
NetC15_2: C15.2 R24.2 R25.1 | length 110
  TopLayer w10: R25.1 C15.2 R24.2
NetC16_1: C16.1 R24.1 U7.2 | length 607.3
  TopLayer w10: R24.1 330.72,1260 466.86,1396.14 466.86,1545.86 C16.1 ; C16.1@509.28,1585 607.82,1486.47 U7.2
NetC18_1: C18.1 R27.1 R28.2 U7.7 | length 235.1
  TopLayer w10: U7.7 735.77,1349.23 R28.2 C18.1 R27.1
NetC18_2: C18.2 R26.2 R28.1 U7.6 | length 477.7
  TopLayer w10: R26.2 C18.2 R28.1 710.18,1348.18 U7.6
NetHL1_K: HL1.K HL2.K HL3.K HL4.K R1.1 | length 2162.7
  TopLayer w10: HL4.K 824,2072 995.87,2072 HL3.K@1044,2023.87 ; HL4.K@731,1993.53 ccw(c731,2028.6) 755.8,2003.8 ccw(c780.6,1979) HL4.K@745.53,1979 ; HL4.K@731,2003.53 ccw(c731,2062.74) 772.87,2020.87 ccw(c814.74,1979) HL4.K@755.53,1979 ; 999.3,2068.57 cw(c950.6,2019.87) HL3.K@1019.47,2019.87 ; 1008.96,2058.92 ccw(c1044,2093.96) 1044,2044.4 ccw(c1044,2103.62) 1085.87,2061.75 ccw(c1127.74,2019.87) HL3.K@1068.53,2019.87 ; 1016.37,2051.5 cw(c984.74,2019.87) HL3.K@1029.47,2019.87 ; HL3.K 1094.13,2070 1311.87,2070 HL2.K@1358,2023.87 ; HL3.K@1044,2034.4 ccw(c1044,2069.47) 1068.8,2044.67 ccw(c1093.6,2019.87) HL3.K@1058.53,2019.87 ; 1313.39,2068.48 cw(c1264.91,2020) HL2.K@1333.47,2020 ; 1322.74,2059.13 ccw(c1358,2094.39) HL2.K@1358,2044.53 ; 1330.46,2051.41 cw(c1299.05,2020) HL2.K@1343.47,2020 ; HL2.K 1361.53,2023.53 1626.47,2023.53 HL1.K ; HL2.K@1368.27,2009.73 cw(c1401.59,1976.41) 1401.59,2023.53 ; HL2.K@1375.34,2002.66 cw(c1425.73,1952.27) 1425.73,2023.53 ; HL2.K@1375.34,2037.34 ccw(c1408.7,2070.7) 1408.7,2023.53 ; HL1.K@1646.47,1979 ccw(c1587.26,1979) 1629.13,2020.87 ccw(c1671,2062.74) HL1.K@1671,2003.53 ; HL1.K@1656.47,1979 ccw(c1621.4,1979) 1646.2,2003.8 ccw(c1671,2028.6) HL1.K@1671,1993.53
  BottomLayer w10: HL1.K@1671,1954.47 cw(c1671,1895.26) 1712.87,1937.13 cw(c1754.74,1979) HL1.K@1695.53,1979 ; HL1.K@1671,1964.47 cw(c1671,1929.4) 1695.8,1954.2 cw(c1720.6,1979) HL1.K@1685.53,1979 ; HL1.K 1753,1897 R1.1
NetR5_2: R5.2 V3.B | length 100.9
  TopLayer w10: R5.2 1779.5,163 V3.B
NetR7_1: R7.1 R8.2 U3.13 | length 1048.6
  TopLayer w10: R7.1 R8.2 1428,1547 1428,1228.72 1698,958.72 1698,818.72 1738.53,778.18 U3.13
NetR7_2: R7.2 U2.2 U2.4 | length 1156.5
  TopLayer w20: U2.4 1313.66,1654.34 R7.2 ; 1273.55,1654.34 cw(c1273.55,1706.23) 1236.85,1669.54 ccw(c1273.55,1706.23) 1273.55,1654.34 ; 1273.55,1654.34 ccw(c1273.55,1602.44) 1236.85,1639.14 cw(c1273.55,1602.44) 1273.55,1654.34
  BottomLayer w20: U2.2 1221.65,1615.76 ; U2.2@1077.56,1493.16 ccw(c1077.56,1545.05) 1114.26,1508.36 ccw(c1150.95,1471.66) U2.2@1099.06,1471.66 ; U2.4 1221.65,1615.76 ; 1221.65,1615.76 cw(c1245.53,1615.76) 1232.97,1636.06 ccw(c1245.53,1615.76) 1221.65,1615.76 ; 1221.65,1615.76 ccw(c1197.78,1615.76) 1210.34,1636.06 cw(c1197.78,1615.76) 1221.65,1615.76 ; 1157.68,1551.78 ccw(c1055.11,1654.34) 1200.16,1654.34 cw(c1055.11,1654.34) 1157.68,1551.78 ; 1191.82,1585.92 ccw(c1123.4,1654.34) 1220.16,1654.34 cw(c1123.4,1654.34) 1191.82,1585.92 ; 1225.96,1620.06 ccw(c1191.68,1654.34) 1240.16,1654.34 cw(c1191.68,1654.34) 1225.96,1620.06
NetR8_1: R8.1 R11.2 U3.14 | length 1065.6
  TopLayer w10: R8.1 1448,1237 1718,967 1718,827 1741.23,803.77 U3.14 1808.77,803.77 1826,821 R11.2
NetR9_1: R9.1 R10.1 U3.12 | length 953.7
  TopLayer w10: R9.1 R10.1 1408,1442 1408,1220.43 1678,950.43 1678,810.43 1735.84,752.59 U3.12
NetR12_1: R12.1 R13.1 U3.10 | length 144.2
  TopLayer w10: U3.10 R13.1@1867.41,701.41 ; R13.1 R12.1
NetR14_2: R14.2 R15.1 U4.3 | length 1126.5
  TopLayer w10: R15.1 1933,1002 U4.3 1968,1002 R14.2 ; R15.1@1883.06,952.06 cw(c1950.63,884.49) U4.3@1984.22,973.95 ; R15.1@1894.04,963.04 cw(c1956.62,900.45) U4.3@1987.73,983.31 ; 1898.27,1071.73 ccw(c1945.67,1119.14) U4.3@1971.58,1057.3 ; 1905.01,974.01 cw(c1962.61,916.41) U4.3@1991.25,992.67 ; 1908.8,1061.2 ccw(c1951.9,1104.29) U4.3@1975.44,1048.08 ; 1911.3,1058.7 cw(c1854.61,1002) U4.3@1934.79,1002 ; 1915.99,984.99 cw(c1968.61,932.37) U4.3@1994.76,1002.04 ; 1919.34,1050.66 ccw(c1958.12,1089.44) U4.3@1979.31,1038.86 ; 1926.97,995.97 cw(c1974.6,948.33) U4.3@1998.28,1011.4 ; 1928.37,1041.63 cw(c1888.75,1002) U4.3@1944.79,1002 ; 1929.88,1040.12 ccw(c1964.34,1074.58) U4.3@1983.17,1029.63
NetR18_1: R18.1 V1.3 | length 157
  TopLayer w20: V1.3 R18.1
NetR19_2: R19.2 R20.1 U5.1 V1.2 | length 1100.5
  TopLayer w10: U5.1 ccw(c1026.88,659.9) 1026.88,584.91 ; U5.1 999.69,584.91 1129.91,584.91 cw(c1129.91,718.35) U5.1@1013.85,652.5 ; U5.1@970.36,627.83 ccw(c1044.05,669.64) 1044.05,584.91 ; U5.1@979.05,632.76 ccw(c1061.22,679.38) 1061.22,584.91 ; U5.1@987.75,637.7 ccw(c1078.39,689.12) 1078.39,584.91 ; U5.1@996.45,642.63 ccw(c1095.56,698.87) 1095.56,584.91 ; U5.1@1004.09,580.51 cw(c1014.71,569.89) U5.1@1014.71,584.91 ; U5.1@1005.15,647.57 ccw(c1112.73,708.61) 1112.73,584.91 ; V1.2 1130,523 R20.1 R19.2
NetR23_1: R23.1 V2.3 | length 100
  TopLayer w10: R23.1 V2.3
pads on no net: JP2.0 JP2.3 JP2.8 JP2.9 JP2.11 JP2.12 U4.1 U7.8 U7.9 U7.10 U7.12 U7.13 U7.14

## Polygon pours and split planes (outlines as drawn)
DGND on TopLayer "TopLayer-No Net" (solid, remove dead copper, pour order 1000): 0,0 2299.21,0 2299,0.21 2299,1548 1721,2126 1570,2126 754,2126 587,2126 586,2125 0,1539 0,0
DGND on BottomLayer "TopLayer-No Net" (solid, remove dead copper, pour order 1001): 0,0 2299.21,0 2299,0.21 2299,1548 1721,2126 1570,2126 754,2126 587,2126 586,2125 0,1539 0,0

## Keep-outs
TopLayer:
  circle w5: c120,1329 r55
  circle w5: c97,324 r55
  circle w5: c2169,1321 r55
  circle w5: c2200,268 r55
BottomLayer:
  circle w5: c120,1329 r55
  circle w5: c97,324 r55
  circle w5: c2169,1321 r55
  circle w5: c2200,268 r55
KeepOutLayer:
  lines w5: 783.46,2125.98 1515.75,2125.98 ; 783.59,2125.59 ccw(c1131.51,1023.19) 0,1259.84 0,0 2299.21,0 2299.21,1259.84 ccw(c1167.14,1023.55) 1515.82,2126.2

## Silkscreen, mask and mechanical layers (free items; w line width, h text height)
TopOverlay:
  circle w10: c2200.79,551.18 r98.43
  circle w10: c98.43,551.18 r98.43
  circle w10: c224.41,1515.75 r98.43
  circle w10: c2074.8,1515.75 r98.43
  text "HGD_Sensor(v0.2)-20200901" at 801,1830 h30
BottomOverlay:
  circle w10: c1149.61,997 r157.48
  circle w10: c98.43,551.18 r98.43
  circle w10: c2200.79,551.18 r98.43
  circle w10: c224.41,1515.75 r98.43
  circle w10: c2074.8,1515.75 r98.43

## Text inside footprints (layer, text, board x,y; h text height)
JP1: BottomOverlay "+" at 1698.39,227.94 h30 r90; BottomOverlay "-" at 1997.61,227.94 h30 r90
U4: BottomOverlay "R" at 1582,1019 h30; BottomOverlay "W" at 1631,1249 h30; BottomOverlay "C" at 1904.33,986.71 h30; TopOverlay "R" at 1550,982 h30; TopOverlay "W" at 1839,1256 h30; TopOverlay "C" at 2079,991 h30
U5: BottomOverlay "W" at 1097,609 h30; BottomOverlay "C" at 1252,606 h30; TopOverlay "C" at 1431,603 h30; TopOverlay "W" at 844,610 h30
U6: BottomOverlay "R" at 415,984 h30; BottomOverlay "W" at 475,1253 h30; BottomOverlay "C" at 751,989 h30; TopOverlay "R" at 396,985 h30; TopOverlay "W" at 476,1254 h30; TopOverlay "C" at 735,991 h30